# Altium PCB SumoPCB.PcbDoc (part 1 of 2)
Units mm, origin at the board's own origin, x right, y up, seen from the top; angles counter-clockwise.
Board outline 140 x 140 mm, 2 copper layers (Top Layer, Bottom Layer); 162 components, 184 nets, 713 pads, 374 vias.
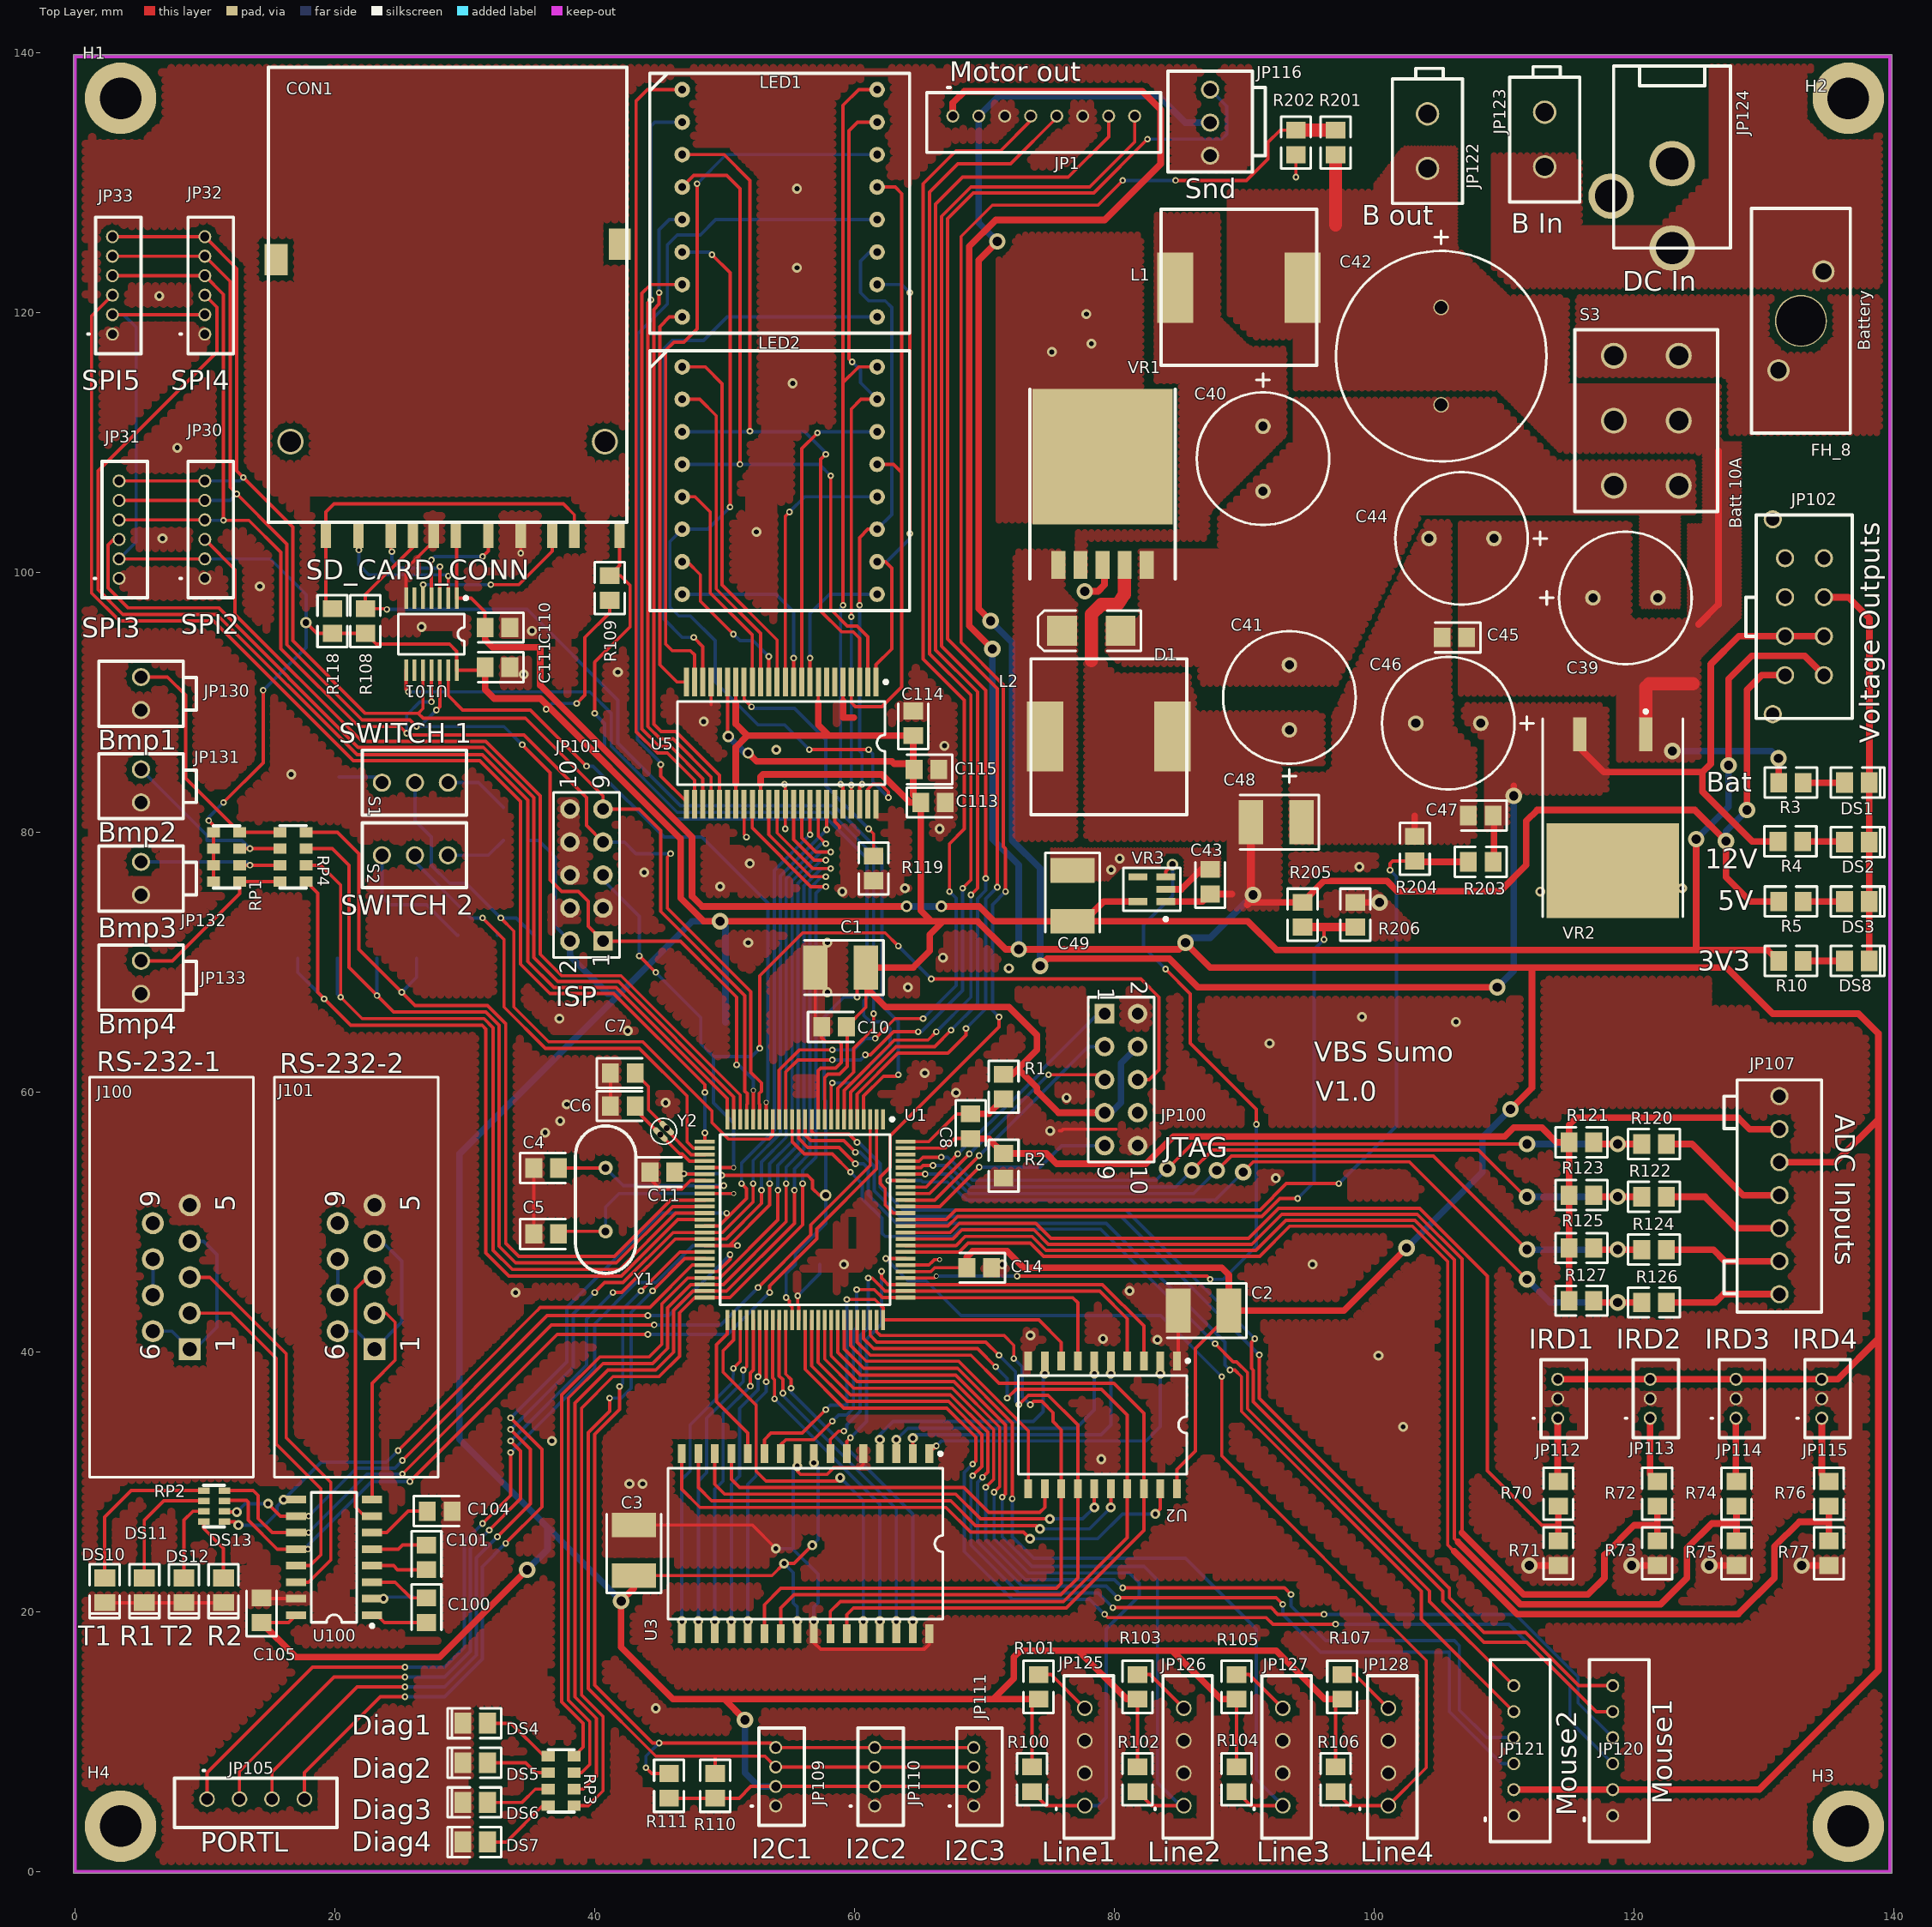
[diagram p0: Top Layer view]
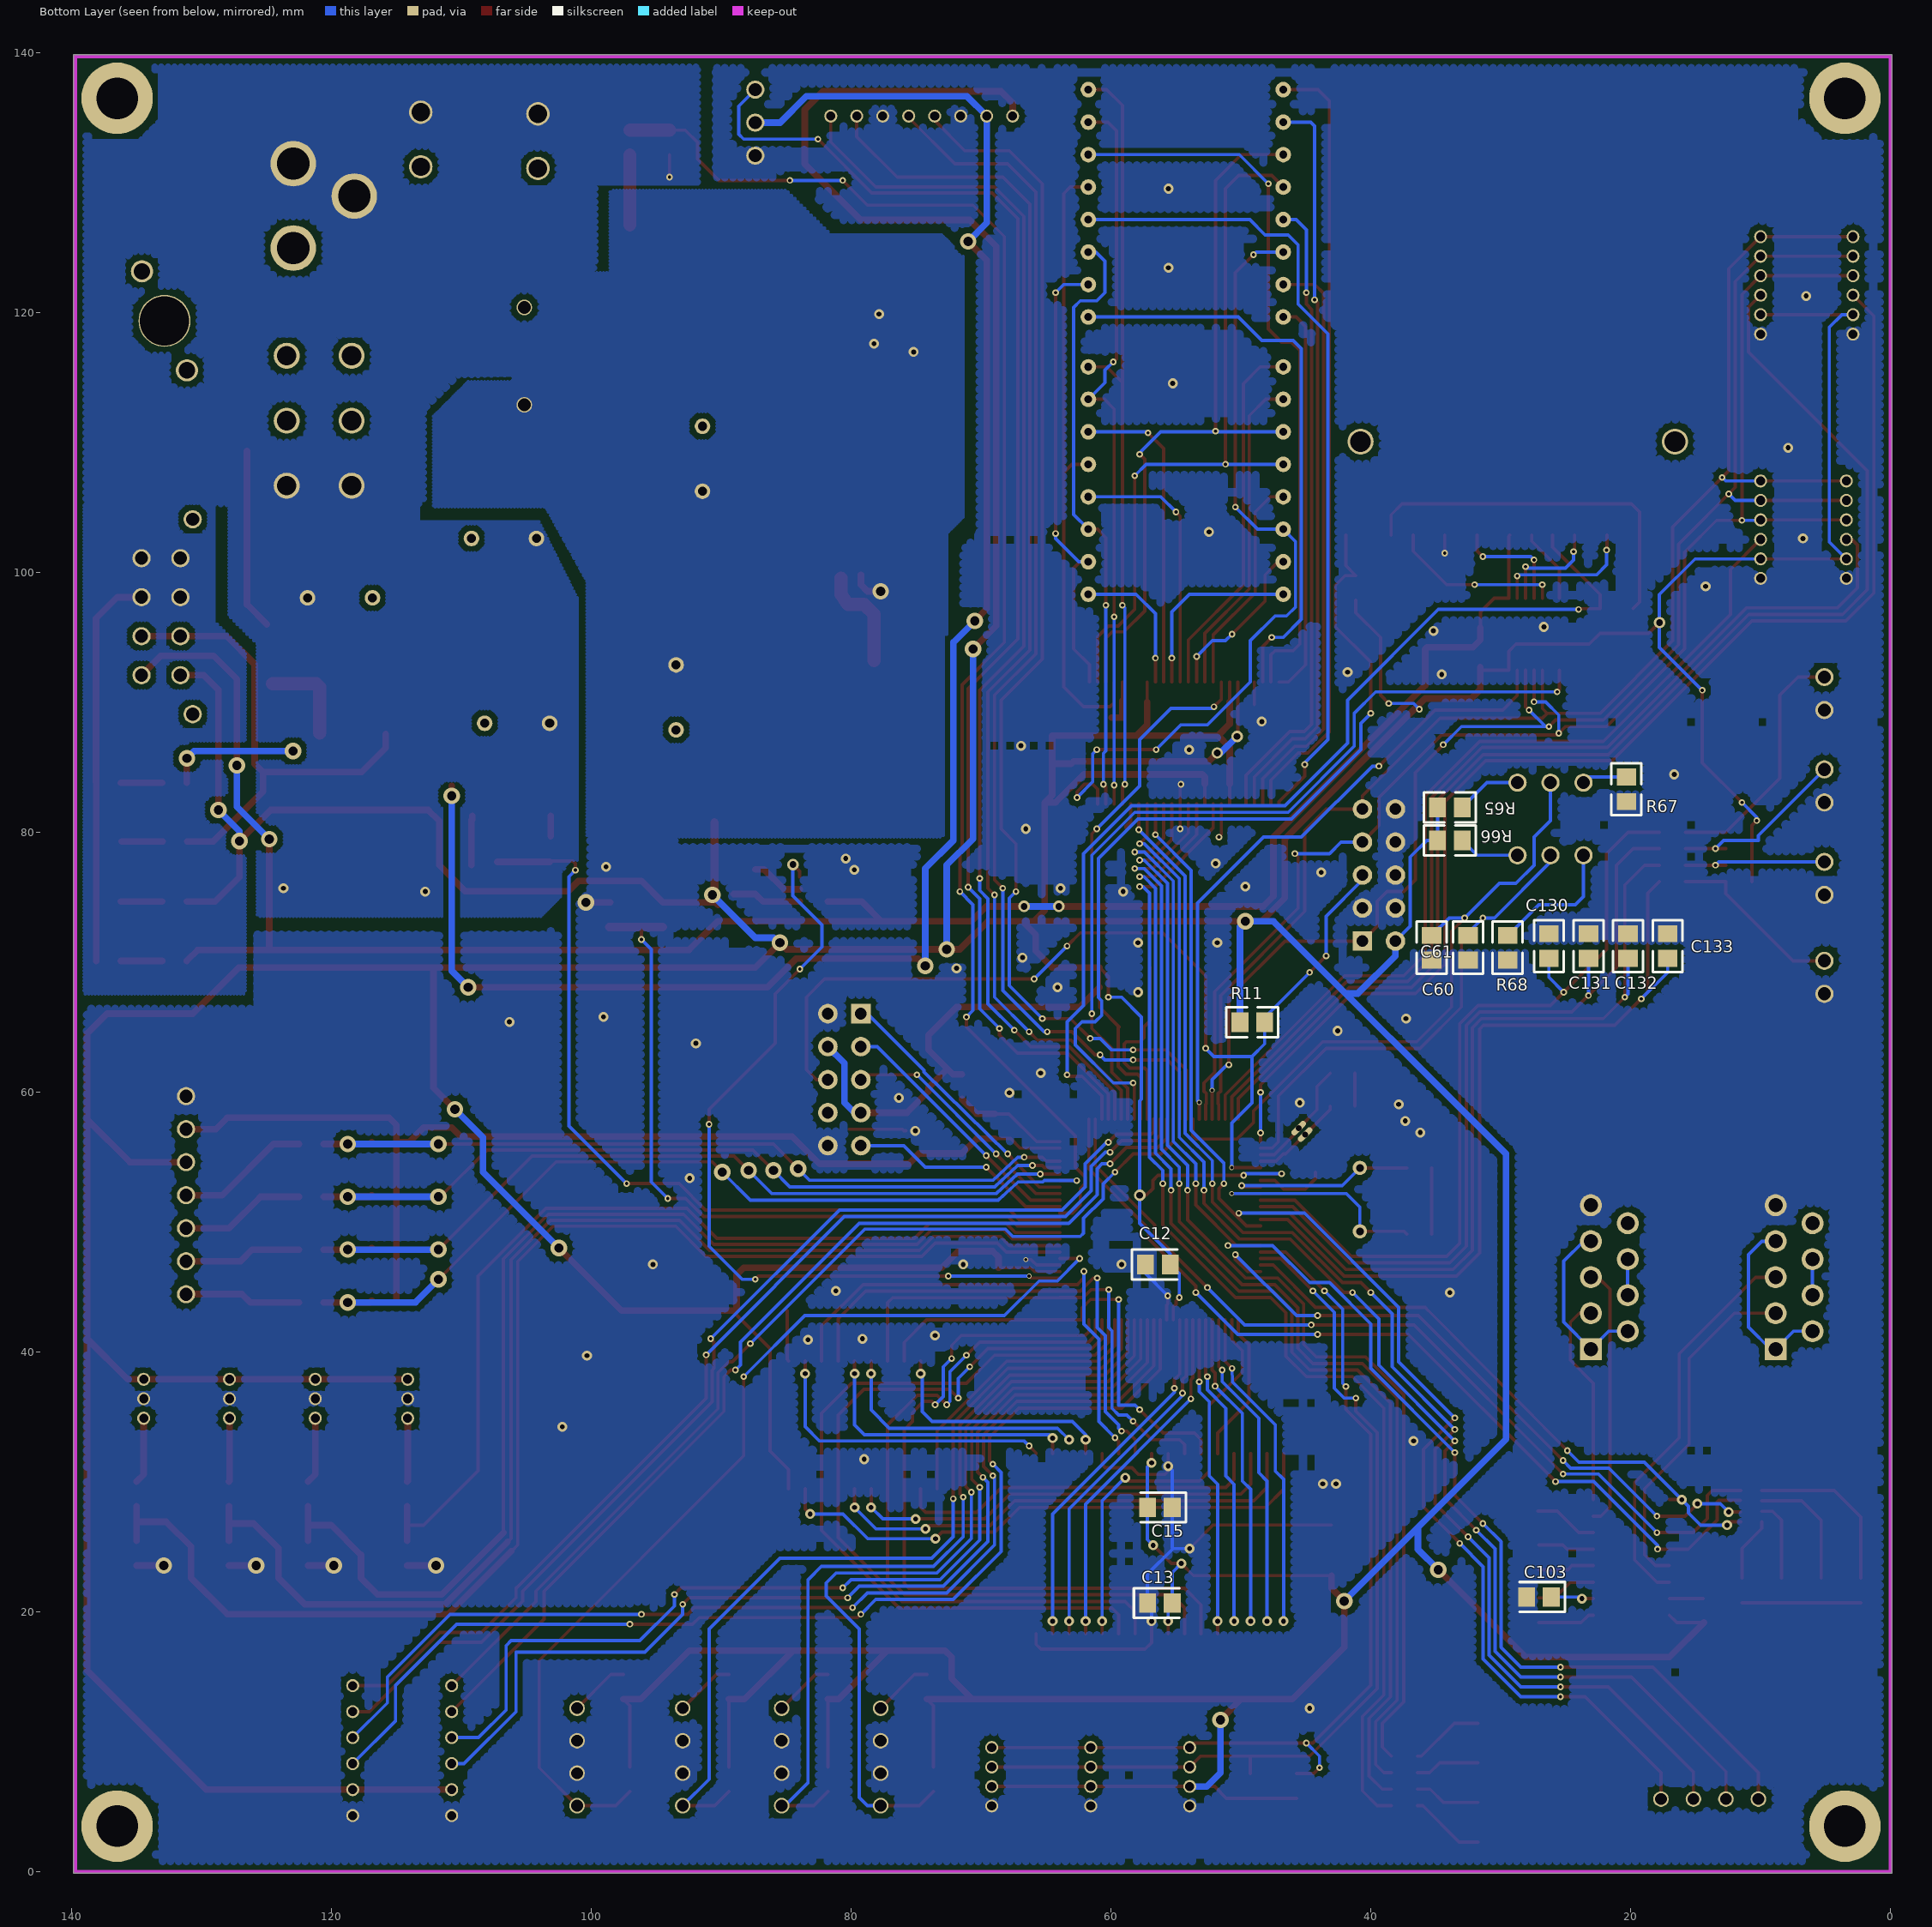
[diagram p1: Bottom Layer view, seen from below]

## Layer stack, top to bottom
Top Layer: signal copper 0.0356
Dielectric: dielectric 0.32, FR-4, Dk 4.8
Bottom Layer: signal copper 0.0356

## Board outline
-0.132,-0.132 139.868,-0.132 139.868,139.868 -0.132,139.868

## Design rules (kind name [scope] priority, off if disabled: settings)
Clearance [(InComponent('U1')) vs (InComponent('U1'))] p1: gap=0.152
Clearance Clearance_1_Polygons [(InPolygon)] p2: gap=0.381
Clearance Clearance_2_All [All] p3: gap=0.203
ComponentClearance [All] p1: gap=0.254 collisioncheckmode=0
HoleSize [All] p1: absolutevalues=TRUE maxlimit=3.8 minlimit=0.025 maxpercent=80.000 minpercent=20.000
PolygonConnect [All] p1: connectstyle=Direct reliefconductorwidth=0.254 reliefentries=4 polygonreliefangle="90 Angle"
RoutingLayers [All] p1: top layer=Horizontal bottom layer=Vertical
RoutingVias "Schematic Routing Via Style" [All] p1: holewidth=0.254 width=0.508 viastyle="Through Hole" minholewidth=0.254 minwidth=0.381 maxholewidth=0.711 maxwidth=1.27
SMDToPlane [All] p1: distance=0
SolderMaskExpansion [All] p1: expansion=0.102
TestPointUsage [All] p1: valid=0 allowmultiple=FALSE
Testpoint [All] p1: side=15 testpointundercomponent=TRUE minsize=1.016 maxsize=2.54 preferedsize=1.524 minholesize=0 maxholesize=1.016 preferedholesize=0.813 testpointgrid=0.025 style=1023 order=1234567890
Width "Schematic Width Constraint" [All] p1: maxlimit=2.54 minlimit=0.254 preferedwidth=0.254
15 further rules are at their usual default settings.

## Classes and differential pairs
component class "Interfaces and Connectors - Sensors": C60 C61 C130 C131 C132 C133 JP112 JP113 JP114 JP115 JP120 JP121 JP125 JP126 JP127 JP128 JP130 JP131 JP132 JP133 R65 R66 R67 R68 R70 R71 R72 R73 R74 R75 R76 R77 R100 R101 R102 R103 R104 R105 R106 R107 RP1 RP4 S1 S2
component class "Interfaces and Connectors": C100 C101 C103 C104 C105 C110 C111 C113 C114 C115 CON1 DS10 DS11 DS12 DS13 J100 J101 JP1 JP30 JP31 JP32 JP33 JP100 JP101 JP102 JP105 JP107 JP109 JP110 JP111 JP116 JP120 JP121 JP124 LED1 LED2 R108 R109 R110 R111 R118 R119 R120 R121 R122 R123 R124 R125 R126 R127 RP2 U5 U100 U101
component class "Microcontroller and Memory": C1 C2 C3 C4 C5 C6 C7 C8 C10 C11 C12 C13 C14 C15 DS1 DS2 DS3 DS4 DS5 DS6 DS7 DS8 H1 H2 H3 H4 R1 R2 R3 R4 R5 R10 R11 RP3 U1 U2 U3 Y1 Y2
component class "Power Regulation and Protection": C39 C40 C41 C42 C43 C44 C45 C46 C47 C48 C49 D1 FH_8 L1 L2 R201 R202 R203 R204 R205 R206 S3 VR1 VR2 VR3
net class A[8..15]: A0 A1 A2 A3 A4 A5 A6 A7 A8 A9 A10 A11 A12 A13 A14 A15
net class AD[0..7]: AD0 AD1 AD2 AD3 AD4 AD5 AD6 AD7

## Components (designator, comment, footprint, x,y, rotation, side; value= is the part's Value field where it differs from the comment)
C1 "Cap Tant" CC4532-1812 58.928,69.596 r180 top
C2 "Cap Tant" CC4532-1812 86.868,43.18 r180 top
C3 "Cap Tant" CC4532-1812 43.026,24.738 r90 top
C4 "20pF" CC2012-0805 36.266,54.166 r0 top
C5 "20pF" CC2012-0805 36.266,49.086 r0 top
C6 "6pF" CC2012-0805 42.164,58.928 r0 top
C7 "6pF" CC2012-0805 42.164,61.468 r0 top
C8 "100nF" CC2012-0805 68.934,57.377 r270 top
C10 "Cap Semi" CC2012-0805 58.42,65.024 r0 top
C11 "Cap Semi" CC2012-0805 45.212,53.848 r0 top
C12 "Cap Semi" CC2012-0805 56.388,46.736 r180 bottom
C13 "Cap Semi" CC2012-0805 56.234,20.674 r180 bottom
C14 "Cap Semi" CC2012-0805 69.596,46.482 r180 top
C15 "Cap Semi" CC2012-0805 56.234,28.04 r0 bottom
C39 "Cap Pol1" CAPPOL5-10X13 116.84,98.044 r0 top
C40 "Cap Pol1" CAPPOL5-10X13 91.44,111.252 r270 top
C41 "Cap Pol1" CAPPOL5-10X13 93.472,87.884 r90 top
C42 "Cap Pol1" CAPPOL7.5-16 105.156,120.396 r270 top
C43 "Cap Pol3" CC2012-0805 87.376,76.2 r90 top
C44 "Cap Pol1" CAPPOL5-10X13 109.22,102.616 r180 top
C45 "Cap Pol3" CC2012-0805 106.172,94.996 r180 top
C46 "Cap Pol1" CAPPOL5-10X13 108.204,88.392 r180 top
C47 "Cap Pol3" CC2012-0805 108.204,81.28 r180 top
C48 "Tant" CC4532-1812 92.456,80.772 r180 top
C49 "Low ESR 0.3-10R Tant" CC4532-1812 76.784,75.108 r270 top
C60 "Cap Semi" CR2012-0805 35.306,71.12 r90 bottom
C61 "Cap Semi" CR2012-0805 32.512,71.12 r270 bottom
C100 "Cap Semi" CC2012-0805 27.051,20.127 r270 top
C101 "Cap Semi" CC2012-0805 27.051,24.191 r270 top
C103 "Cap Semi" CC2012-0805 27.051,21.143 r0 bottom
C104 "Cap Semi" CC2012-0805 28.067,27.747 r0 top
C105 "Cap Semi" CC2012-0805 14.351,20.127 r90 top
C110 "Cap Semi" CC2012-0805 32.512,95.758 r180 top
C111 "Cap Semi" CC2012-0805 32.512,92.71 r180 top
C113 "Cap Semi" CC2012-0805 66.04,82.296 r0 top
C114 "Cap Semi" CC2012-0805 64.516,88.392 r90 top
C115 "Cap Semi" CC2012-0805 65.532,84.836 r180 top
C130 "Cap Semi" CR2012-0805 26.289,71.247 r270 bottom
C131 "Cap Semi" CR2012-0805 23.241,71.247 r270 bottom
C132 "Cap Semi" CR2012-0805 20.193,71.247 r270 bottom
C133 "Cap Semi" CR2012-0805 17.145,71.247 r270 bottom
CON1 "SD_CARD_CONN" "SD CARD AVX" 19.304,102.87 r0 top
D1 "10BQ100" SMB 78.232,95.504 r180 top
DS1 "Bat" "SMD _LED" 137.16,83.82 r180 top
DS2 "12V" "SMD _LED" 137.16,79.248 r180 top
DS3 "5V" "SMD _LED" 137.16,74.676 r180 top
DS4 "Diag1" "SMD _LED" 30.8,11.43 r0 top
DS5 "Diag2" "SMD _LED" 30.8,8.382 r0 top
DS6 "Diag3" "SMD _LED" 30.8,5.334 r0 top
DS7 "Diag4" "SMD _LED" 30.8,2.286 r0 top
DS8 "3V3" "SMD _LED" 137.16,70.104 r180 top
DS10 "T1" "SMD _LED" 2.286,21.651 r90 top
DS11 "R1" "SMD _LED" 5.334,21.651 r90 top
DS12 "T2" "SMD _LED" 8.382,21.651 r90 top
DS13 "R2" "SMD _LED" 11.43,21.651 r90 top
FH_8 "Battery" "FUSEHOLDER MINIBLADE" 136.652,128.016 r180 top
H1 "M3 Clearance" "M3 CLEARANCE"#1 3.175,135.89 r0 top
H2 "M3 Clearance" "M3 CLEARANCE"#2 135.763,133.35 r0 top
H3 "M3 Clearance" "M3 CLEARANCE"#3 136.271,3.302 r0 top
H4 "M3 Clearance" "M3 CLEARANCE"#4 3.556,3.556 r0 top
J100 "RS-232-1" "DSUB1.385-2H9 SIMPLE" 13.716,30.353 r90 top
J101 "RS-232-2" "DSUB1.385-2H9 SIMPLE" 27.94,30.353 r90 top
JP1 "Motor out" "PHR 1X8 2MM" 67.564,135.128 r0 top
JP30 "SPI2" "ZHR 1X6 1.5MM" 12.192,98.044 r90 top
JP31 "SPI3" "ZHR 1X6 1.5MM" 5.588,98.044 r90 top
JP32 "SPI4" "ZHR 1X6 1.5MM" 12.192,116.84 r90 top
JP33 "SPI5" "ZHR 1X6 1.5MM" 5.08,116.84 r90 top
JP100 "JTAG" HDR2X5 79.248,66.04 r270 top
JP101 "ISP" HDR2X5 40.64,71.628 r90 top
JP102 "Voltage Outputs" "microfit 2x4 3mm" 134.62,101.092 r90 top
JP105 "PORTL" "EHR 1X4 2.5MM" 10.16,5.588 r0 top
JP107 "ADC Inputs" "KK 1X7 2.54MM" 131.191,59.69 r270 top
JP109 "I2C1" "ZHR 1X4 1.5MM" 56.134,3.556 r90 top
JP110 "I2C2" "ZHR 1X4 1.5MM" 63.754,3.556 r90 top
JP111 "I2C3" "ZHR 1X4 1.5MM" 71.374,3.556 r90 top
JP112 "IRD1" "ZHR 1X3 1.5MM" 116.332,33.401 r90 top
JP113 "IRD2" "ZHR 1X3 1.5MM" 123.444,33.401 r90 top
JP114 "IRD3" "ZHR 1X3 1.5MM" 130.048,33.401 r90 top
JP115 "IRD4" "ZHR 1X3 1.5MM" 136.652,33.401 r90 top
JP116 "Snd" "KK 1X3 2.54MM" 87.376,132.08 r90 top
JP120 "Mouse1" "PHR 1X6 2MM" 118.364,4.318 r90 top
JP121 "Mouse2" "PHR 1X6 2MM" 110.744,4.318 r90 top
JP122 "B out" "MINI-FIT JNR 2X1 4.2MM" 106.807,128.397 r90 top
JP123 "B In" "MINI-FIT JNR 2X1 4.2MM" 115.824,128.524 r90 top
JP124 "DC In" "DC JACK 2.1MM" 122.936,124.968 r90 top
JP125 "Line1" "EHR 1X4 2.5MM" 77.724,5.08 r90 top
JP126 "Line2" "EHR 1X4 2.5MM" 85.344,5.08 r90 top
JP127 "Line3" "EHR 1X4 2.5MM" 92.964,5.08 r90 top
JP128 "Line4" "EHR 1X4 2.5MM" 101.092,5.08 r90 top
JP130 "Bmp1" "KK 1X2 2.54MM" 5.08,89.408 r90 top
JP131 "Bmp2" "KK 1X2 2.54MM" 5.08,82.296 r90 top
JP132 "Bmp3" "KK 1X2 2.54MM" 5.08,75.184 r90 top
JP133 "Bmp4" "KK 1X2 2.54MM" 5.08,67.564 r90 top
L1 "Inductor" "CDRH125 INDUCTOR" 94.488,121.92 r90 top
L2 "Inductor" "CDRH125 INDUCTOR" 74.676,87.376 r270 top
LED1 "8x8 LED Matrix" "8X8 LED MATRIX" 46.736,137.16 r0 top
LED2 "8x8 LED Matrix" "8X8 LED MATRIX" 46.736,115.824 r0 top
R1 "0K" R2012-0805 71.474,60.425 r90 top
R2 "0K" R2012-0805 71.474,54.329 r90 top
R3 "Res3" R2012-0805 132.08,83.82 r180 top
R4 "Res3" R2012-0805 132.044,79.299 r180 top
R5 "Res3" R2012-0805 132.08,74.676 r180 top
R10 "Res3" R2012-0805 132.08,70.104 r180 top
R11 "Res3" R2012-0805 49.122,65.378 r180 bottom
R65 "Res3" R2012-0805 33.909,81.915 r0 bottom
R66 "Res3" R2012-0805 33.909,79.375 r0 bottom
R67 "Res3" R2012-0805 20.32,83.312 r270 bottom
R68 "Res3" R2012-0805 29.464,71.12 r270 bottom
R70 "Res1" CR2012-0805 114.173,29.083 r90 top
R71 "Res1" CR2012-0805 114.173,24.511 r90 top
R72 "Res1" CR2012-0805 121.793,29.083 r90 top
R73 "Res1" CR2012-0805 121.793,24.511 r90 top
R74 "Res1" CR2012-0805 127.889,29.083 r90 top
R75 "Res1" CR2012-0805 127.889,24.511 r90 top
R76 "Res1" CR2012-0805 135.001,29.083 r90 top
R77 "Res1" CR2012-0805 135.001,24.511 r90 top
R100 "Res1" R2012-0805 73.66,7.112 r270 top
R101 "Res1" R2012-0805 74.168,14.224 r90 top
R102 "Res1" R2012-0805 81.788,7.112 r270 top
R103 "Res1" R2012-0805 81.788,14.224 r90 top
R104 "Res1" R2012-0805 89.408,7.112 r270 top
R105 "Res1" R2012-0805 89.408,14.224 r90 top
R106 "Res1" R2012-0805 97.028,7.112 r270 top
R107 "Res1" R2012-0805 97.536,14.224 r90 top
R108 "Res3" CR2012-0805 22.352,96.266 r270 top
R109 "Res3" CR2012-0805 41.148,98.806 r270 top
R110 "10K" CR2012-0805 49.276,6.604 r270 top
R111 "10K" CR2012-0805 45.72,6.604 r270 top
R118 "Res3" CR2012-0805 19.812,96.266 r270 top
R119 "Res3" CR2012-0805 61.468,77.216 r90 top
R120 "Res1" CR2012-0805 121.539,56.007 r0 top
R121 "Res1" CR2012-0805 115.951,56.134 r0 top
R122 "Res1" CR2012-0805 121.539,51.943 r0 top
R123 "Res1" CR2012-0805 115.951,52.07 r0 top
R124 "Res1" CR2012-0805 121.539,47.879 r0 top
R125 "Res1" CR2012-0805 115.951,48.006 r0 top
R126 "Res1" CR2012-0805 121.539,43.815 r0 top
R127 "Res1" CR2012-0805 115.951,43.942 r0 top
R201 "Res3" R2012-0805 97.028,133.096 r90 top
R202 "Res3" R2012-0805 93.98,133.096 r270 top
R203 "Res3" R2012-0805 108.204,77.724 r180 top
R204 "Res3" R2012-0805 103.124,78.74 r90 top
R205 "Res3" R2012-0805 94.488,73.66 r270 top
R206 "Res3" R2012-0805 98.552,73.66 r90 top
RP1 "ResPack x4" "4X0805 RESISTOR PACK" 10.668,76.2 r90 top
RP2 "ResPack x4" "4X0603 RESISTOR PACK" 9.906,29.337 r270 top
RP3 "ResPack x4" "4X0805 RESISTOR PACK" 38.42,8.89 r270 top
RP4 "ResPack x4" "4X0805 RESISTOR PACK" 17.78,80.01 r270 top
S1 "SWITCH 1" "SW SPDT" 23.622,83.82 r0 top
S2 "SWITCH 2" "SW SPDT" 23.622,78.232 r0 top
S3 "Batt 10A" "SW  DPDT" 123.444,106.68 r90 top
U1 "ATmega2560" F-QFP14X14-G100/Z17N 56.203,50.192 r270 top
U2 "74HC373M" SO-G20/Y1.45 79.094,34.39 r180 top
U3 "K6R1008C1D" SO-G32/Y1.45 56.234,25.246 r180 top
U5 "TLC5920" SSO-G48 54.356,86.868 r180 top
U100 "MAX232" SO-G16/C5.85 19.939,24.191 r90 top
U101 "MAX3392E" TSSOP14 27.432,95.25 r180 top
VR1 "LM2595S-5.0" "TO-263 5 PIN SMT" 75.692,100.584 r270 top
VR2 "MC7812CD2T" 936-03 118.364,82.296 r180 top
VR3 "TPS76333DBVR" SOT-23-5 82.88,75.616 r90 top
Y1 "16MHz" "CRYSTAL HC49SLF" 40.838,54.166 r270 top
Y2 "32kHz" "CRYSTAL CFS206" 45.058,56.742 r45 top

## Footprints (in the part's own frame and the unit in brackets; to place one, negate y for a bottom-side part, rotate by r counter-clockwise, add the part's x,y. Pads: shape width x height; smd on the part's side, far side on the other; paste and mask are expansions set on the pad)
"4X0603 RESISTOR PACK" [mm] "4x0603 Resistor pack 3.2 x 1.6mm, 0.8mm Pitch"
  rect 0.5x0.9 smd: 1(0,0) 2(0.8,0) 3(1.6,0) 4(2.4,0) 5(2.4,1.6) 6(1.6,1.6) 7(0.8,1.6) 8(0,1.6)
  silkscreen extent -0.4,0 2.8,1.6
"4X0805 RESISTOR PACK" [mm] "4x0805 Resistor pack 5.08 x 2mm, 1.27mm Pitch"
  rect 0.8x1 smd: 1(0,-2) 2(1.27,-2) 3(2.54,-2) 4(3.81,-2) 5(3.81,0) 6(2.54,0) 7(1.27,0) 8(0,0)
  silkscreen extent -0.5,-2 4.3,0
"8X8 LED MATRIX" [mm] "8x8 LED matrix 2.5mm pitch"
  round 1.2 hole 0.6: 1(0,0) 2(0,-2.5) 3(0,-5) 4(0,-7.5) 5(0,-10) 6(0,-12.5) 7(0,-15) 8(0,-17.5) 9(15,-17.5) 10(15,-15) 11(15,-12.5) 12(15,-10) 13(15,-7.5) 14(15,-5) 15(15,-2.5) 16(15,0)
  silkscreen extent -2.5,-18.75 17.5,1.25
936-03 [mm] "D2-PAK/TO-263-AB; 3 Leads (1 Cropped); Body 14.7 (inc. leads) x 10.2 mm (LxW max)"
  rect 1x2.6 smd: 1(-2.54,-5.25) 3(2.54,-5.25)
  rect 10.2x7.3 smd: 4(0,5.25)
  silkscreen extent -5.4,-7.12 5.4,8.8
CAPPOL5-10X13 [mm]
  round 1.2 hole 0.7: 1(0,0) 2(5,0)
  silkscreen extent -4.06,-5.1 7.6,5.1
CAPPOL7.5-16 [mm] "7.5P, 16D, 0.8PD"
  round 1.2 hole 1: 1(0,0) 2(7.5,0)
  silkscreen extent -5.9,-8.1 11.85,8.1
CC2012-0805 [mm]
  rect 1.3x1.5 smd: 1(-0.95,0) 2(0.95,0)
  silkscreen extent -2,-1.15 1.5,1.15
CC4532-1812 [mm]
  rect 1.9x3.4 smd: 1(-1.95,0) 2(1.95,0)
  silkscreen extent -3.3,-2.1 2.8,2.1
"CDRH125 INDUCTOR" [mm] "CDRH125 Inductor 12.3mm x 12.3mm"
  rect 5.4x2.8 smd: 1(0,0) 2(0,9.8)
  silkscreen extent -5.98,-1.1 6.02,10.9
CR2012-0805 [mm]
  rect 1.3x1.5 smd: 1(-0.95,0) 2(0.95,0)
  silkscreen extent -2,-1.15 2,1.15
"CRYSTAL CFS206" [mm] "Crystal CFS206 0.7mm pitch 0.2mm lead"
  oval 0.45x1.4 hole 0.45: 1(0,0) 2(0.7,0)
  silkscreen extent -0.65,-1 1.35,1
"CRYSTAL HC49SLF" [mm] "HC49SLF TH 4.88mm Pitch, 0.43mm lead"
  round 1.1 hole 0.6: 1(0,0) 2(4.88,0)
  silkscreen extent -3.23,-2.32 8.12,2.32
"DC JACK 2.1MM" [mm] "DC Jack 2.1mm  Altronics P0620"
  round 3.5 hole 2.5: 1(0,0) 2(6.5,0) 3(4,4.7)
  silkscreen extent 0,-4.5 14,4.5
"DSUB1.385-2H9 SIMPLE" [mm]
  rect 1.69x1.69 hole 1.09: 1(9.86,4.88)
  round 1.69 hole 1.09: 2(12.63,4.88) 3(15.4,4.88) 4(18.17,4.88) 5(20.94,4.88) 6(11.245,7.72) 7(14.015,7.72) 8(16.785,7.72) 9(19.555,7.72)
  silkscreen extent 0,0 30.8,12.6
"EHR 1X4 2.5MM" [mm] "JST EHR 1x4 2.5mm 3A"
  round 1.2 hole 0.9: 1(0,0) 2(2.5,0) 3(5,0) 4(7.5,0)
  silkscreen extent -2.5,-2.2 10,2.2
F-QFP14X14-G100/Z17N [mm]
  rect 1.55x0.3 smd: 1(-7.725,6) 2(-7.725,5.5) 3(-7.725,5) 4(-7.725,4.5) 5(-7.725,4) 6(-7.725,3.5) 7(-7.725,3) 8(-7.725,2.5) 9(-7.725,2) 10(-7.725,1.5) 11(-7.725,1) 12(-7.725,0.5) 13(-7.725,0) 14(-7.725,-0.5) 15(-7.725,-1) 16(-7.725,-1.5) 17(-7.725,-2) 18(-7.725,-2.5) 19(-7.725,-3) 20(-7.725,-3.5) 21(-7.725,-4) 22(-7.725,-4.5) 23(-7.725,-5) 24(-7.725,-5.5) 25(-7.725,-6) 51(7.725,-6) 52(7.725,-5.5) 53(7.725,-5) 54(7.725,-4.5) 55(7.725,-4) 56(7.725,-3.5) 57(7.725,-3) 58(7.725,-2.5) 59(7.725,-2) 60(7.725,-1.5) 61(7.725,-1) 62(7.725,-0.5) 63(7.725,0) 64(7.725,0.5) 65(7.725,1) 66(7.725,1.5) 67(7.725,2) 68(7.725,2.5) 69(7.725,3) 70(7.725,3.5) 71(7.725,4) 72(7.725,4.5) 73(7.725,5) 74(7.725,5.5) 75(7.725,6)
  rect 0.3x1.55 smd: 26(-6,-7.725) 27(-5.5,-7.725) 28(-5,-7.725) 29(-4.5,-7.725) 30(-4,-7.725) 31(-3.5,-7.725) 32(-3,-7.725) 33(-2.5,-7.725) 34(-2,-7.725) 35(-1.5,-7.725) 36(-1,-7.725) 37(-0.5,-7.725) 38(0,-7.725) 39(0.5,-7.725) 40(1,-7.725) 41(1.5,-7.725) 42(2,-7.725) 43(2.5,-7.725) 44(3,-7.725) 45(3.5,-7.725) 46(4,-7.725) 47(4.5,-7.725) 48(5,-7.725) 49(5.5,-7.725) 50(6,-7.725) 76(6,7.725) 77(5.5,7.725) 78(5,7.725) 79(4.5,7.725) 80(4,7.725) 81(3.5,7.725) 82(3,7.725) 83(2.5,7.725) 84(2,7.725) 85(1.5,7.725) 86(1,7.725) 87(0.5,7.725) 88(0,7.725) 89(-0.5,7.725) 90(-1,7.725) 91(-1.5,7.725) 92(-2,7.725) 93(-2.5,7.725) 94(-3,7.725) 95(-3.5,7.725) 96(-4,7.725) 97(-4.5,7.725) 98(-5,7.725) 99(-5.5,7.725) 100(-6,7.725)
  silkscreen extent -7.85,-6.55 6.55,6.83
"FUSEHOLDER MINIBLADE" [mm] "FuseHolder Miniblade"
  round 1.7 hole 1.27: 1(2.07,4.84) 2(5.53,12.46)
  round 4 hole 3.8: ""(3.8,8.65)
  silkscreen extent 0,0 7.6,17.3
HDR2X5 [mm] "Connector; Header; 5x2 Position"
  rect 1.5x1.5 hole 0.9: 1(0,0)
  round 1.5 hole 0.9: 2(0,2.54) 3(2.54,0) 4(2.54,2.54) 5(5.08,0) 6(5.08,2.54) 7(7.62,0) 8(7.62,2.54) 9(10.16,0) 10(10.16,2.54)
  silkscreen extent -1.27,-1.27 11.43,3.81
"KK 1X2 2.54MM" [mil] "KK 1x2 2.54mm 4A"
  round 55 hole 40: 1(0,0) 2(100,0)
  silkscreen extent -49,-167 148,128
"KK 1X3 2.54MM" [mil] "KK 1x3 2.54mm 4A"
  round 55 hole 40: 1(0,0) 2(100,0) 3(200,0)
  silkscreen extent -49,-167 256,128
"KK 1X7 2.54MM" [mil] "Molex KK 1x7 2.54mm 4A"
  round 55 hole 40: 1(0,0) 2(100,0) 3(200,0) 4(300,0) 5(400,0) 6(500,0) 7(600,0)
  silkscreen extent -49,-167 654,128
"M3 CLEARANCE"#1 [mm] "M3 Clearance.   3.2mm ID for M3 screw"
  round 5.5 hole 3.2: 1(0.325,0.61)
"M3 CLEARANCE"#2 [mm] "M3 Clearance.   3.2mm ID for M3 screw"
  round 5.5 hole 3.2: 1(0.737,3.15)
"M3 CLEARANCE"#3 [mm] "M3 Clearance.   3.2mm ID for M3 screw"
  round 5.5 hole 3.2: 1(0.229,0.198)
"M3 CLEARANCE"#4 [mm] "M3 Clearance.   3.2mm ID for M3 screw"
  round 5.5 hole 3.2: 1(-0.056,-0.056)
"microfit 2x4 3mm" [mm] "microfit 2x4 3mm 5A"
  round 1.4 hole 1.02: 1(0,0) 2(-3,0) 3(-6,0) 4(-9,0) 5(0,3) 6(-3,3) 7(-6,3) 8(-9,3) nc(-12,3.94) nc(3,3.94)
  silkscreen extent -12.32,-2.18 3.32,6
"MINI-FIT JNR 2X1 4.2MM" [mm] "Mini-Fit Jnr 2x1 4.2mm pitch 9A"
  round 1.8 hole 1.4: 1(2.7,2.7) 2(6.9,2.7)
  silkscreen extent 0,0 10.4,5.4
"PHR 1X6 2MM" [mm] "JST PHR 1x6 2mm 2A"
  round 1 hole 0.7: 1(0,0) 2(2,0) 3(4,0) 4(6,0) 5(8,0) 6(10,0)
  silkscreen extent -2,-2.8 12,2.2
"PHR 1X8 2MM" [mm] "JST PHR 1x8 2mm 2A"
  round 1 hole 0.7: 1(0,0) 2(2,0) 3(4,0) 4(6,0) 5(8,0) 6(10,0) 7(12,0) 8(14,0)
  silkscreen extent -2,-2.8 16,2.2
R2012-0805 [mm]
  rect 1.3x1.5 smd: 1(-0.95,0) 2(0.95,0)
  silkscreen extent -2,-1.15 2,1.15
"SD CARD AVX" [mm] "SD Card AVX 145638009211862"
  rect 0.8x2 smd: 1(2.5,0) 2(5,0) 3(8.3,0) 4(10,0) 5(12.5,0) 6(15,0) 7(17.43,0) 8(19.13,0) 9(0,0) 10(6.7,0) 11(22.62,0)
  rect 1.7x2.4 smd: 12(22.63,22.4)
  rect 1.8x2.4 smd: ""(-3.82,21.2)
  round 2 hole 1.6: ""(-2.72,7.2) ""(21.48,7.2)
  silkscreen extent -4.42,1 23.18,36
SMB [mm] "DO-214-AA/SMB; 2 C-Bend Leads; Body 5.3 x 3.6 mm, inc. leads (LxW)"
  rect 2.3x2.3 smd: 1(-2.25,0) 2(2.25,0)
  silkscreen extent -3.8,-1.55 4.1,1.55
"SMD _LED" [mm]
  rect 1.3x1.6 smd: 1(0.95,0) 2(-0.95,0)
  silkscreen extent -2.13,-1.15 2,1.15
SO-G16/C5.85 [mm]
  rect 0.6x1.55 smd: 1(-4.445,-2.925) 2(-3.175,-2.925) 3(-1.905,-2.925) 4(-0.635,-2.925) 5(0.635,-2.925) 6(1.905,-2.925) 7(3.175,-2.925) 8(4.445,-2.925) 9(4.445,2.925) 10(3.175,2.925) 11(1.905,2.925) 12(0.635,2.925) 13(-0.635,2.925) 14(-1.905,2.925) 15(-3.175,2.925) 16(-4.445,2.925)
  silkscreen extent -5.39,-3.05 5,1.75
SO-G20/Y1.45 [mm]
  rect 0.6x1.45 smd: 1(-5.715,-4.925) 2(-4.445,-4.925) 3(-3.175,-4.925) 4(-1.905,-4.925) 5(-0.635,-4.925) 6(0.635,-4.925) 7(1.905,-4.925) 8(3.175,-4.925) 9(4.445,-4.925) 10(5.715,-4.925) 11(5.715,4.925) 12(4.445,4.925) 13(3.175,4.925) 14(1.905,4.925) 15(0.635,4.925) 16(-0.635,4.925) 17(-1.905,4.925) 18(-3.175,4.925) 19(-4.445,4.925) 20(-5.715,4.925)
  silkscreen extent -6.69,-5.05 6.48,3.8
SO-G32/Y1.45 [mm]
  rect 0.6x1.45 smd: 1(-9.525,-6.925) 2(-8.255,-6.925) 3(-6.985,-6.925) 4(-5.715,-6.925) 5(-4.445,-6.925) 6(-3.175,-6.925) 7(-1.905,-6.925) 8(-0.635,-6.925) 9(0.635,-6.925) 10(1.905,-6.925) 11(3.175,-6.925) 12(4.445,-6.925) 13(5.715,-6.925) 14(6.985,-6.925) 15(8.255,-6.925) 16(9.525,-6.925) 17(9.525,6.925) 18(8.255,6.925) 19(6.985,6.925) 20(5.715,6.925) 21(4.445,6.925) 22(3.175,6.925) 23(1.905,6.925) 24(0.635,6.925) 25(-0.635,6.925) 26(-1.905,6.925) 27(-3.175,6.925) 28(-4.445,6.925) 29(-5.715,6.925) 30(-6.985,6.925) 31(-8.255,6.925) 32(-9.525,6.925)
  silkscreen extent -10.58,-7.05 10.58,5.8
SOT-23-5 [mm]
  rect 0.55x1.45 smd: 1(-0.95,-1.075) 2(0,-1.075) 3(0.95,-1.075) 4(0.95,1.075) 5(-0.95,1.075)
  silkscreen extent -2.42,-2.2 1.65,2.2
SSO-G48 [mm] "SSO-G48 25mil (~0.6mm)P 48 pads"
  rect 0.4x2.2 smd: 1(-7.302,-4.7) 2(-6.667,-4.7) 3(-6.032,-4.7) 4(-5.397,-4.7) 5(-4.762,-4.7) 6(-4.127,-4.7) 7(-3.492,-4.7) 8(-2.857,-4.7) 9(-2.222,-4.7) 10(-1.587,-4.7) 11(-0.952,-4.7) 12(-0.317,-4.7) 13(0.318,-4.7) 14(0.953,-4.7) 15(1.588,-4.7) 16(2.223,-4.7) 17(2.858,-4.7) 18(3.493,-4.7) 19(4.128,-4.7) 20(4.763,-4.7) 21(5.398,-4.7) 22(6.033,-4.7) 23(6.667,-4.7) 24(7.302,-4.7) 25(7.302,4.7) 26(6.667,4.7) 27(6.032,4.7) 28(5.397,4.7) 29(4.762,4.7) 30(4.127,4.7) 31(3.492,4.7) 32(2.858,4.7) 33(2.222,4.7) 34(1.587,4.7) 35(0.952,4.7) 36(0.317,4.7) 37(-0.318,4.7) 38(-0.953,4.7) 39(-1.588,4.7) 40(-2.223,4.7) 41(-2.858,4.7) 42(-3.493,4.7) 43(-4.128,4.7) 44(-4.763,4.7) 45(-5.397,4.7) 46(-6.033,4.7) 47(-6.667,4.7) 48(-7.302,4.7)
  silkscreen extent -8.18,-4.82 8,3.2
"SW  DPDT" [mm] "Alltronics Toggle"
  round 2 hole 1.5: 1(0,0) 2(5,0) 3(10,0) 4(0,5) 5(5,5) 6(10,5)
  silkscreen extent -2,-3 12,8
"SW SPDT" [mm] "SW SPDT 0.1\" pitch"
  round 1.4 hole 1: 1(0,0) 2(2.54,0) 3(5.08,0)
  silkscreen extent -1.5,-2.5 6.5,2.5
"TO-263 5 PIN SMT" [mm] "TO-263 5 Pin SMT"
  rect 2.16x1.07 smd: 1(0,0) 2(0,1.7) 3(0,3.4) 4(0,5.1) 5(0,6.8)
  rect 10.41x10.8 smd: 3(-8.33,3.4)
  silkscreen extent -13.5,-2.2 1.1,9
TSSOP14 [mm] "Shrink Small Outline; 14 Leads; Body Width 4.4 mm; Pitch 0.65 mm"
  rect 0.3x1.65 smd: 1(-1.95,-2.775) 2(-1.3,-2.775) 3(-0.65,-2.775) 4(0,-2.775) 5(0.65,-2.775) 6(1.3,-2.775) 7(1.95,-2.775) 8(1.95,2.775) 9(1.3,2.775) 10(0.65,2.775) 11(0,2.775) 12(-0.65,2.775) 13(-1.3,2.775) 14(-1.95,2.775)
  silkscreen extent -2.77,-2.9 2.55,1.55
"ZHR 1X3 1.5MM" [mm] "JST ZHR 1x3 1.5mm 1A"
  round 1 hole 0.7: 1(1.5,2.2) 2(3,2.2) 3(4.5,2.2)
  silkscreen extent 0,0 6,4.1
"ZHR 1X4 1.5MM" [mm] "JST ZHR 1x4 1.5mm 1A"
  round 1 hole 0.7: 1(1.5,2.2) 2(3,2.2) 3(4.5,2.2) 4(6,2.2)
  silkscreen extent 0,0 7.5,4.1
"ZHR 1X6 1.5MM" [mm] "JST ZHR 1x6 1.5mm 1A"
  round 1 hole 0.7: 1(1.5,2.2) 2(3,2.2) 3(4.5,2.2) 4(6,2.2) 5(7.5,2.2) 6(9,2.2)
  silkscreen extent 0,0 10.5,4.1

## Part data
C1 C2 C3 C100 C101 C103 C104 C105: library part "Cap Pol2", "Polarized Capacitor (Axial)"
C4 C5 C6 C7 C8: library part Cap, "Capacitor"
C10 C11 C12 C13 C14 C15 C60 C61 C110 C111 C113 C114 C115 C130 C131 C132 C133: "Capacitor (Semiconductor SIM Model)"
C39 C40 C41 C42 C44 C46: "Polarized Capacitor (Radial)"
C43 C45 C47: "Polarized Capacitor (Surface Mount)"
C48 C49: library part "Cap Semi", "Capacitor (Semiconductor SIM Model)"
D1: "Schottky Rectifier"
DS1 DS2 DS3 DS4 DS5 DS6 DS7 DS8 DS10 DS11 DS12 DS13: library part LED3, "Typical BLUE SiC LED"
FH_8: library part Fuse_Holder, "Fuse Holder"
H1 H2 H3 H4: library part "M3 Clearance hole", "3.2mm ID clearance hole for M3 screw"
J100 J101: library part "D Connector 9", "Receptacle Assembly, 9 Position, Right Angle"
JP1: library part "Header 8", "Header, 8-Pin"
JP30 JP31 JP32 JP33: library part "Header 6", "Header, 6-Pin"
JP100 JP101: library part "Header 5X2", "Header, 5-Pin, Dual row"
JP102: library part "Header 4X2", "Header, 4-Pin, Dual row"
JP105 JP107 JP109 JP110 JP111: library part "Header 4", "Header, 4-Pin"
JP112 JP113 JP114 JP115: library part MHDR1X3, "Header, 3-Pin"
JP116 JP124: library part "Header 3", "Header, 3-Pin"
JP120 JP121 JP122 JP123 JP130 JP131 JP132 JP133: library part "Header 2", "Header, 2-Pin"
JP125 JP126 JP127 JP128: library part "Header 4H", "Header, 4-Pin, Right Angle"
R1 R2 R110 R111: library part Res1, "Resistor"
R3 R4 R5 R10 R11 R65 R66 R67 R68 R70 R71 R72 R73 R74 R75 R76 R77 R100 R101 R102 R103 R104 R105 R106 R107 R108 R109 R118 R119 R120 R121 R122 R123 R124 R125 R126 R127 R201 R202 R203 R204 R205 R206: "Resistor"
S1 S2: library part SW-PB, "Switch"
S3: library part SW-SPDT, "SPDT Subminiature Toggle Switch, Right Angle Mounting, Vertical Actuation"
U1: "Atmel ATmega2560 MCU"
U2: library part 74373, "Octal 8-bit D-type Latch"
U3: "Samsung 128Kx8 High-Speed Static RAM"
U5: library part "TLC5920 16x8 LED Driver", "TLC5920 16x8 LED Driver"
U100: "Maxim RS-232 Transceiver"
VR1: "Simple Switcher Power Converter 150 kHz 1A Step Down Voltage Regulator"
VR2: "Three-Terminal Positive Voltage Regulator"
Y1 Y2: library part XTAL, "Crystal Oscillator"

## Via types
v1: diameter 0.508, hole 0.254, Top Layer to Bottom Layer, 222 vias
v2: diameter 0.762, hole 0.381, Top Layer to Bottom Layer, 100 vias
v3: diameter 1.27, hole 0.711, Top Layer to Bottom Layer, 39 vias
v4: diameter 0.889, hole 0.508, Top Layer to Bottom Layer, 7 vias
v5: diameter 0.381, hole 0.254, Top Layer to Bottom Layer, 6 vias

## Nets (pads, with @x,y where several pads share a name; then routed paths per layer and width w, separated by ;. In a path a pad name is that pad's centre, name@x,y a point inside that pad or via, vN(x,y) a via of type N, cw(c..) or ccw(c..) an arc to the next point about the centre after c; other vN are vias at no path point)
3V3: C49.2 C110.2 CON1.4 JP102.4 R10.2 U101.1 VR3.5 | length 159.1
  Top Layer w0.254: CON1.4@29.304,102.87 29.382,102.792 U101.1@29.382,98.025 30.499,98.025 31.562,96.962 C110.2@31.562,95.758
  Top Layer w0.508: C110.2@31.562,95.758 31.562,94.803 32.131,94.234 35.687,94.234 35.814,94.107 35.814,91.313 47.498,79.629 47.498,75.057 48.26,74.295 v4(64.008,74.295) ; v4(66.675,74.295) 69.596,74.295 70.733,73.158 90.266,73.158 92.481,70.942 130.292,70.942 R10.2@131.13,70.104 ; C49.2@77.668,73.158 79.176,74.666 VR3.5@81.805,74.666 ; 124.79,70.942 v3(124.79,79.477) ; v3(127.279,85.141) 127.279,91.796 129.057,93.574 133.138,93.574 JP102.4@134.62,92.092
  Bottom Layer w0.508: v4(64.008,74.295) v4(66.675,74.295) ; v3(124.79,79.477) 127.279,81.966 v3(127.279,85.141)
"3V3 ENABLE": U1.79 VR3.3 | length 63.3
  Top Layer w0.254: U1.79@63.928,45.692 66.139,45.692 v5(66.294,45.847) ; v1(72.517,45.847) 87.122,45.847 v1(87.376,45.593) ; v1(83.947,69.469) 85.852,67.564 85.852,63.754 90.932,58.674 v1(90.932,57.531) ; VR3.3@83.955,76.566 83.955,76.996 v4(84.48,77.521)
  Bottom Layer w0.254: v5(66.294,45.847) v1(72.517,45.847) ; v1(83.947,69.469) 82.245,71.171 82.245,72.873 84.48,75.108 v4(84.48,77.521) ; v1(87.376,45.593) 88.392,45.593 90.932,48.133 v1(90.932,57.531)
5V: C1.1 C2.1 C3.1 C10.2 C11.2 C12.2 C13.2 C14.2 C15.2 C41.1 C43.1 C48.2 C105.1 C111.2 C113.1 C114.1 C115.2 JP1.1 JP30.2 JP31.2 JP32.2 JP33.2 JP100.4 JP100.7 JP101.2 JP102.8 JP107.3 JP109.2 JP110.2 JP111.2 JP112.3 JP113.3 JP114.3 JP115.3 JP120.2 JP121.2 L2.2 R1.2 R5.2 R11.1 R65.2 R66.2 R100.1 R101.1 R102.1 R103.1 R104.1 R105.1 R106.1 R107.1 R108.2 R109.2 R110.2 R111.2 R118.2 R205.1 RP1.5 RP1.6 RP1.7 RP1.8 U1.10 U1.31 U1.61 U1.80 U2.20 U3.8 U3.24 U5.8 U5.18 U5.19 U5.31 U5.34 U100.16 U101.14 VR1.4 VR3.1 | length 1076.7
  Top Layer w0.254: JP33.2@2.88,119.84 JP32.2@9.992,119.84 ; JP31.2@3.388,101.044 JP30.2@9.992,101.044 ; v1(10.287,80.899) 10.668,80.518 RP1.8@10.668,76.2 ; v1(11.43,82.296) 14.478,85.344 v1(14.478,90.932) ; C105.1@14.351,19.177 16.445,19.177 U100.16@17.014,19.746 ; v4(17.78,96.139) 18.603,95.316 R108.2@22.352,95.316 23.18,94.488 28.829,94.488 29.382,93.935 U101.14@29.382,92.475 31.327,92.475 C111.2@31.562,92.71 ; v1(36.261,89.474) 36.261,89.85 ; v1(38.608,89.916) 39.243,90.551 39.243,94.996 41.148,96.901 R109.2@41.148,97.856 ; C3.1@43.026,22.788 53.649,22.788 v2(54.583,23.722) 55.345,23.722 v2(56.742,25.119) ; R111.2@45.72,5.654 51.12,5.654 52.022,6.556 JP111.2@69.174,6.556 ; v1(46.863,53.721) 46.892,53.692 U1.31@48.478,53.692 ; v1(49.784,53.594) 56.388,53.594 56.769,53.213 56.769,52.578 57.277,52.07 v4(57.785,52.07) ; U5.19@50.228,91.568 50.228,87.439 v4(50.292,87.376) ; U5.31@50.863,82.168 50.863,83.725 ; 50.863,90.011 U5.18@50.863,91.568 ; U5.34@52.768,82.168 52.768,83.725 ; v1(54.737,44.196) 54.991,43.942 54.991,43.669 55.203,43.458 U1.61@55.203,42.467 ; U3.24@55.599,18.321 v2(55.599,19.277) ; v2(56.869,31.469) U3.8@56.869,32.171 ; 57.213,90.011 U5.8@57.213,91.568 ; U1.10@57.703,57.917 57.703,61.132 57.963,61.392 58.852,61.392 59.436,61.976 59.436,64.958 C10.2@59.37,65.024 60.878,66.532 C1.1@60.878,69.596 60.198,68.916 v1(60.198,67.31) ; U1.80@63.928,46.192 65.877,46.192 66.167,46.482 C14.2@68.646,46.482 ; R100.1@73.66,8.062 73.66,12.766 R101.1@74.168,13.274 ; R102.1@81.788,8.062 R103.1@81.788,13.274 ; U2.20@84.809,29.465 84.809,30.961 86.233,32.385 86.233,40.259 88.818,42.844 C2.1@88.818,43.18 ; R104.1@89.408,8.062 R105.1@89.408,13.274 ; R106.1@97.028,8.062 97.028,12.766 R107.1@97.536,13.274
  Top Layer w0.508: C105.1@14.351,19.177 17.018,16.51 28.067,16.51 v3(34.798,23.241) ; C111.2@31.562,92.71 31.562,90.993 32.258,90.297 35.814,90.297 46.609,79.502 46.609,74.93 48.387,73.152 69.469,73.152 71.628,70.993 84.963,70.993 v3(85.471,71.501) 87.376,69.596 127.127,69.596 130.683,66.04 137.287,66.04 138.811,64.516 138.811,15.494 129.635,6.318 JP121.2@110.744,6.318 ; C3.1@43.026,22.788 43.026,21.817 v3(42.037,20.828) 42.037,17.272 46.035,13.274 R101.1@74.168,13.274 ; 49.972,13.274 v3(51.562,11.684) ; 50.863,83.725 50.863,86.556 51.75,87.442 ; 50.863,90.011 50.863,88.328 51.75,87.442 ; v4(51.816,86.106) 52.451,85.471 62.865,85.471 63.058,85.278 C115.2@64.516,85.278 ; 52.768,83.725 52.768,84.264 52.959,84.455 62.103,84.455 64.262,82.296 C113.1@65.09,82.296 ; 57.213,90.011 57.213,88.268 58.039,87.442 ; C1.1@60.878,68.072 62.402,66.548 71.882,66.548 74.041,64.389 74.041,63.246 72.17,61.375 R1.2@71.474,61.375 ; C1.1@60.878,69.596 64.516,69.596 65.786,70.866 65.786,72.136 66.802,73.152 ; 65.913,73.152 65.09,73.975 C113.1@65.09,82.296 ; JP1.1@67.564,135.128 67.564,136.144 68.453,137.033 82.169,137.033 83.566,135.636 83.566,131.445 79.248,127.127 70.866,127.127 68.834,125.095 68.834,95.885 v3(70.612,94.107) ; C14.2@68.646,46.482 68.646,47.31 69.088,47.752 71.755,47.752 73.025,46.482 88.265,46.482 88.818,45.929 C2.1@88.818,43.18 97.663,43.18 v3(102.489,48.006) ; 70.678,13.274 72.263,14.859 72.263,16.51 72.771,17.018 92.456,17.018 96.2,13.274 R107.1@97.536,13.274 ; 72.596,61.801 74.041,60.355 74.041,60.071 75.692,58.42 JP100.7@79.248,58.42 ; 77.216,17.018 80.96,13.274 R103.1@81.788,13.274 ; VR3.1@83.955,74.666 86.792,74.666 C43.1@87.376,75.25 89.037,75.25 ; 84.455,17.018 88.199,13.274 R105.1@89.408,13.274 ; v3@90.292,74.742 90.424,74.61 R205.1@94.488,74.61 96.129,76.251 100.99,76.251 101.778,75.463 109.703,75.463 111.709,77.47 111.709,80.874 112.547,81.712 124.689,81.712 v3(127.076,79.324) 127.076,76.556 128.956,74.676 R5.2@131.13,74.676 ; v3(110.49,58.674) 112.141,60.325 112.141,69.596 ; JP112.3@114.132,37.901 135.691,37.901 138.811,41.021 ; v3(128.702,81.712) 128.702,90.957 129.836,92.092 JP102.8@131.62,92.092 ; JP107.3@131.191,54.61 135.509,54.61 138.811,57.912 ; 51.75,87.442 C114.1@64.516,87.442 64.516,84.902 64.516,82.87 C113.1@65.09,82.296
  Top Layer w0.52: 90.236,74.422 90.33,74.516 90.424,74.61 v3@90.506,74.692
  Top Layer w0.635: v3@90.506,74.692 C48.2@90.506,80.772
  Top Layer w1.016: 78.232,93.218 78.232,96.774 78.994,97.536 80.264,97.536 80.772,98.298 VR1.4@80.772,99.568
  Bottom Layer w0.254: JP33.2@2.88,119.84 3.731,119.84 4.699,118.872 4.699,102.355 JP31.2@3.388,101.044 ; JP30.2@9.992,101.044 15.034,101.044 17.78,98.298 17.78,94.234 v1(14.478,90.932) ; v1(10.287,80.899) 10.287,81.153 v1(11.43,82.296) ; R65.2@34.859,81.915 R66.2@34.859,79.375 35.687,79.375 36.957,78.105 36.957,72.771 JP101.2@38.1,71.628 ; v1(36.261,89.474) 36.703,89.916 v1(38.608,89.916) ; v1(46.863,53.721) 49.657,53.721 v1(49.784,53.594) ; v2(54.583,23.722) 55.284,23.021 C13.2@55.284,20.674 55.599,20.359 v2(55.599,19.277) ; v1(54.737,44.196) 54.737,46.035 C12.2@55.438,46.736 55.438,47.564 57.785,49.911 57.785,59.325 57.658,59.452 57.658,65.786 59.182,67.31 v1(60.198,67.31) ; v2(56.742,25.119) 57.184,25.561 57.184,31.154 v2(56.869,31.469)
  Bottom Layer w0.508: v3(34.798,23.241) 36.372,24.815 36.372,26.493 ; JP101.2@38.1,71.628 38.1,70.485 40.994,67.591 41.937,67.591 ; v3(42.037,20.828) 29.591,33.274 29.591,55.245 47.498,73.152 v3(49.657,73.152) 50.072,72.737 R11.1@50.072,65.378 ; v4(50.292,87.376) 51.562,86.106 v4(51.816,86.106) ; v3(51.562,11.684) 51.562,7.62 52.626,6.556 JP109.2@53.934,6.556 ; v3(70.612,94.107) 70.612,79.502 72.644,77.47 v3(72.644,70.993) ; JP100.7@79.248,58.42 79.756,58.42 80.518,59.182 80.518,62.23 JP100.4@81.788,63.5 ; v3(85.471,71.501) 85.598,71.501 85.979,71.882 87.376,71.882 v3(90.678,75.184) ; v3(102.489,48.006) 108.331,53.848 108.331,56.515 v3(110.49,58.674) ; v3(127.076,79.324) 127.076,80.086 v3(128.702,81.712)
5VSENSE: R205.2 R206.1 U1.87 | length 56.9
  Top Layer w0.254: U1.87@63.928,49.692 67.206,49.692 67.933,50.419 91.352,50.419 92.749,51.816 v1(94.107,51.816) ; v1(96.139,71.755) 96.139,72.71
  Top Layer w0.635: R205.2@94.488,72.71 R206.1@98.618,72.71
  Bottom Layer w0.254: v1(94.107,51.816) 95.377,53.086 95.377,70.993 v1(96.139,71.755)
12V: C46.1 C47.1 JP1.2 JP102.3 JP102.7 JP116.2 R4.2 R203.1 VR2.3 | length 183.1
  Top Layer w0.508: v3(70.485,96.266) 69.545,97.206 69.545,124.028 v3(70.993,125.476) ; v3(74.295,69.723) 74.854,70.282 84.226,70.282 86.436,68.072 v3(109.474,68.072) ; C47.1@109.154,80.965 C47.1@109.154,81.28 ; R203.1@109.22,77.47 C47.1@109.22,80.965 ; v3(110.744,82.804) 110.744,83.566 ; VR2.3@115.824,87.546 115.824,86.487 117.678,84.633 125.273,84.633 ; R4.2@131.094,79.299 129.108,79.299 125.273,83.134 125.273,84.633 ; JP102.3@134.62,95.092 128.061,95.092 125.908,92.939 125.908,85.268 125.273,84.633
  Top Layer w0.52: VR2.3@115.824,86.766 VR2.3@115.824,87.546
  Bottom Layer w0.508: v3(70.485,96.266) 72.136,94.615 72.136,79.375 74.295,77.216 v3(74.295,69.723) ; v3(70.993,125.476) 69.564,126.905 JP1.2@69.564,135.128 71.088,136.652 83.439,136.652 85.471,134.62 JP116.2@87.376,134.62 ; v3(109.474,68.072) 110.744,69.342 v3(110.744,82.804)
12VSENSE: R203.2 R204.1 U1.88 | length 67.2
  Top Layer w0.254: U1.88@63.928,50.192 67.059,50.192 67.795,50.927 91.214,50.927 93.246,52.959 v1(97.282,52.959) ; v1(101.219,77.089) 101.219,77.597 101.412,77.79 R204.1@103.124,77.79
  Top Layer w0.508: R204.1@103.19,77.724 R203.2@107.254,77.724
  Bottom Layer w0.254: v1(97.282,52.959) 101.727,57.404 101.727,76.581 v1(101.219,77.089)
A0: U2.2 U3.1 | length 23.7
  Top Layer w0.254: U3.1@65.759,32.171 65.759,32.231 v1(66.294,32.766) ; v2(83.539,38.327) U2.2@83.539,39.315
  Bottom Layer w0.254: v1(66.294,32.766) 66.675,33.147 82.423,33.147 83.539,34.263 v2(83.539,38.327)
A1: U2.5 U3.2 | length 21.8
  Top Layer w0.254: U3.2@64.489,32.171 v2(64.489,33.374) ; v2(79.729,38.327) U2.5@79.729,39.315
  Bottom Layer w0.254: v2(64.489,33.374) 64.743,33.628 78.967,33.628 79.729,34.39 v2(79.729,38.327)
A2: U2.6 U3.3 | length 20.1
  Top Layer w0.254: v2@63.219,33.12 v2(63.219,33.247) ; v2(78.459,38.327) U2.6@78.459,39.315
  Bottom Layer w0.254: v2(63.219,33.247) 64.108,34.136 77.062,34.136 78.459,35.533 v2(78.459,38.327)
A3: U2.9 U3.4 | length 18.7
  Top Layer w0.254: U3.4@61.949,32.171 v2(61.949,33.247) ; v2(74.649,38.327) U2.9@74.649,39.315
  Bottom Layer w0.254: v2(61.949,33.247) 61.949,33.628 62.965,34.644 73.76,34.644 74.522,35.406 74.522,38.2 v2(74.649,38.327)
A4: U2.12 U3.13 | length 28.7
  Top Layer w0.254: U3.13@50.519,32.171 50.519,30.199 51.154,29.564 68.426,29.564 70.331,27.659 74.268,27.659 74.649,28.04 U2.12@74.649,29.465
A5: U2.15 U3.14 | length 34.5
  Top Layer w0.254: U3.14@49.249,32.171 49.249,29.818 50.011,29.056 67.791,29.056 69.696,27.151 v2(75.03,27.151) ; v2(78.459,28.04) U2.15@78.459,29.465
  Bottom Layer w0.254: v2(75.03,27.151) 77.57,27.151 v2(78.459,28.04)
A6: U2.16 U3.15 | length 37.8
  Top Layer w0.254: U3.15@47.979,32.171 47.979,29.564 48.995,28.548 67.41,28.548 69.315,26.643 74.014,26.643 v2(74.268,26.389) ; v2(79.729,28.04) U2.16@79.729,29.465
  Bottom Layer w0.254: v2(74.268,26.389) 78.078,26.389 v2(79.729,28.04)
A7: U2.19 U3.16 | length 43.6
  Top Layer w0.254: U3.16@46.709,32.171 46.709,29.437 48.106,28.04 67.029,28.04 68.934,26.135 72.998,26.135 v2(73.506,25.627) ; v2(83.158,27.532) 83.539,27.913 U2.19@83.539,29.465
  Bottom Layer w0.254: v2(73.506,25.627) 78.713,25.627 80.618,27.532 v2(83.158,27.532)
A8: U1.53 U3.17 | length 25
  Top Layer w0.254: v1(50.673,38.735) 51.203,39.265 U1.53@51.203,42.467
  Bottom Layer w0.254: v2(46.709,19.277) 46.709,30.199 47.344,30.834 47.344,34.39 50.646,37.692 v1(50.673,38.735)
A9: U1.54 U3.18 | length 24.7
  Top Layer w0.254: v1(51.435,38.608) 51.703,38.876 U1.54@51.703,42.467
  Bottom Layer w0.254: v2(47.979,19.277) 47.979,30.072 48.614,30.707 48.614,34.898 51.435,37.719 v1(51.435,38.608)
A10: U1.55 U3.19 | length 24.4
  Top Layer w0.254: v1(51.976,37.371) 51.976,38.387 52.203,38.614 U1.55@52.203,42.467
  Bottom Layer w0.254: v2(49.249,19.277) 49.249,29.437 49.884,30.072 49.884,35.279 v1(51.976,37.371)
A11: U1.56 U3.20 | length 24.1
  Top Layer w0.254: v1(52.578,38.1) 52.703,38.225 U1.56@52.703,42.467
  Bottom Layer w0.254: v2(50.519,19.277) 50.519,29.818 51.154,30.453 51.154,35.66 52.578,37.084 v1(52.578,38.1)
A12: U1.57 U3.21 | length 24.7
  Top Layer w0.254: U3.21@51.789,18.321 v2(51.789,19.277) ; v1(53.203,37.709) U1.57@53.203,42.467
  Bottom Layer w0.254: v2(51.789,19.277) 51.789,29.818 52.424,30.453 52.424,36.168 53.203,36.947 v1(53.203,37.709)
A13: U1.58 U3.29 | length 27.6
  Top Layer w0.254: U1.58@53.703,42.467 53.703,38.011 53.848,37.865 v1(53.848,36.394) ; U3.29@61.949,18.321 v2(61.949,19.277)
  Bottom Layer w0.254: v1(53.848,36.394) 61.949,28.294 v2(61.949,19.277)
A14: U1.59 U3.30 | length 27.9
  Top Layer w0.254: U1.59@54.203,42.467 54.203,38.157 54.483,37.877 v1(54.483,36.83) ; U3.30@63.219,18.321 v2(63.219,19.277)
  Bottom Layer w0.254: v1(54.483,36.83) 54.483,36.648 63.219,27.913 v2(63.219,19.277)
A15: U1.60 U3.31 | length 28.2
  Top Layer w0.254: U1.60@54.703,42.467 54.703,38.304 55.118,37.888 v1(55.118,37.211) ; U3.31@64.489,18.321 v2(64.489,19.277)
  Bottom Layer w0.254: v1(55.118,37.211) 55.118,36.902 64.489,27.532 v2(64.489,19.277)
AD0: U1.78 U2.3 U3.6 | length 40
  Top Layer w0.254: U3.6@59.409,32.171 59.409,33.12 v1(59.69,33.401) ; v1(62.076,46.201) 62.076,45.705 62.581,45.2 62.581,45.192 U1.78@63.928,45.192 ; U1.78@64.017,45.192 79.087,45.192 82.269,42.01 U2.3@82.269,39.315
  Bottom Layer w0.254: v1(59.69,33.401) 60.933,34.644 60.933,40.994 62.076,42.137 v1(62.076,46.201)
AD1: U1.77 U2.4 U3.7 | length 39.4
  Top Layer w0.254: U3.7@58.139,32.171 58.139,33.274 58.774,33.909 v1(59.182,33.909) ; v1(61.06,45.693) 61.361,45.693 62.354,44.7 ; 62.354,44.692 U1.77@63.928,44.692 ; U1.77@63.936,44.684 78.876,44.684 80.999,42.561 U2.4@80.999,39.315
  Bottom Layer w0.254: v1(59.182,33.909) 59.409,34.136 59.409,34.39 60.425,35.406 60.425,41.248 61.06,41.883 v1(61.06,45.693)
AD2: U1.76 U2.7 U3.10 | length 38.6
  Top Layer w0.254: U3.10@54.329,32.171 54.329,32.866 54.71,33.247 56.869,33.247 v1(58.293,34.671) ; v1(60.171,44.804) 61.524,44.804 62.136,44.192 U1.76@63.928,44.192 ; U1.76@63.944,44.176 76.801,44.176 77.189,43.788 U2.7@77.189,39.315
  Bottom Layer w0.254: v1(58.293,34.671) 58.774,35.152 59.409,35.152 59.917,35.66 59.917,41.629 60.171,41.883 v1(60.171,44.804)
AD3: U1.75 U2.8 U3.11 | length 36.5
  Top Layer w0.254: U3.11@53.059,32.171 53.059,33.247 53.567,33.755 55.98,33.755 v1(57.785,35.56) ; v1(59.409,44.042) 61.568,44.042 62.203,43.407 U1.75@62.203,42.467 74.192,42.467 75.919,40.74 U2.8@75.919,39.315
  Bottom Layer w0.254: v1(57.785,35.56) 58.139,35.914 59.409,35.914 v1(59.409,44.042)
AD4: U1.74 U2.13 U3.22 | length 58.4
  Top Layer w0.254: U3.22@53.059,18.321 53.059,20.547 54.329,21.817 75.538,21.817 75.919,22.198 75.919,34.009 75.284,34.644 75.284,35.333 74.422,36.195 73.787,36.195 v1(73.533,35.941) ; U1.74@61.703,42.467 61.703,41.548 61.976,41.275 71.501,41.275 72.263,40.513 v1(72.263,39.497)
  Bottom Layer w0.254: v1(72.263,39.497) 72.898,38.862 72.898,36.576 v1(73.533,35.941)
AD5: U1.73 U2.14 U3.23 | length 59.5
  Top Layer w0.254: U3.23@54.329,18.321 54.329,20.293 55.345,21.309 75.879,21.309 77.189,22.618 77.189,34.39 74.901,36.678 73.381,36.678 v1(72.644,35.941) ; U1.73@61.203,42.467 61.203,41.286 61.722,40.767 70.104,40.767 v1(71.12,39.751)
  Bottom Layer w0.254: v1(71.12,39.751) 72.39,38.481 72.39,36.195 v1(72.644,35.941)
AD6: U1.72 U2.17 U3.26 | length 62
  Top Layer w0.254: U3.26@58.139,18.321 58.139,20.039 58.901,20.801 76.089,20.801 80.999,25.71 80.999,35.152 79.015,37.135 72.441,37.135 v1(71.755,36.449) ; U1.72@60.703,42.467 60.703,41.024 61.468,40.259 69.469,40.259 v1(70.866,38.862)
  Bottom Layer w0.254: v1(70.866,38.862) 71.755,37.973 v1(71.755,36.449)
AD7: U1.71 U2.18 U3.27 | length 62.1
  Top Layer w0.254: U3.27@59.409,18.321 59.409,19.785 59.917,20.293 76.3,20.293 82.269,26.262 82.269,35.279 79.955,37.592 71.12,37.592 68.961,39.751 61.214,39.751 60.203,40.762 U1.71@60.203,42.467
ADC0: R120.1 R121.2 U1.97 | length 60.5
  Top Layer w0.254: U1.97@63.928,54.692 64.967,54.692 65.266,54.991 v1(66.675,54.991) ; v3(84.074,54.102) 85.979,56.007 v3(111.76,56.007)
  Top Layer w0.508: R121.2@116.901,56.134 117.028,56.007 R120.1@120.589,56.007
  Bottom Layer w0.254: v1(66.675,54.991) 67.183,54.991 69.088,53.213 83.185,53.213 v3(84.074,54.102)
  Bottom Layer w0.508: v3(111.76,56.007) v3(118.745,56.007)
ADC1: R122.1 R123.2 U1.96 | length 61.9
  Top Layer w0.254: U1.96@63.928,54.192 65.114,54.192 65.278,54.356 v1(66.04,54.356) ; v3(85.979,53.975) 87.554,55.55 108.026,55.55 111.633,51.943 v3(111.76,51.943)
  Top Layer w0.508: R123.2@116.901,52.07 117.028,51.943 R122.1@120.589,51.943
  Bottom Layer w0.254: v1(66.04,54.356) 67.171,54.356 68.949,52.705 84.709,52.705 v3(85.979,53.975)
  Bottom Layer w0.508: v3(111.76,51.943) v3(118.745,51.943)
ADC2: R124.1 R125.2 U1.95 | length 63.3
  Top Layer w0.254: U1.95@63.928,53.692 v1(65.434,53.692) ; v3(87.884,53.975) 89.002,55.093 104.546,55.093 v3(111.76,47.879)
  Top Layer w0.508: R125.2@116.901,48.006 117.028,47.879 R124.1@120.589,47.879
  Bottom Layer w0.254: v1(65.434,53.692) 67.189,53.692 68.811,52.197 86.106,52.197 v3(87.884,53.975)
  Bottom Layer w0.508: v3(111.76,47.879) v3(118.745,47.879)
ADC3: R126.1 R127.2 U1.94 | length 67.6
  Top Layer w0.254: v1(62.632,53.192) U1.94@63.928,53.192 ; v3(89.916,53.848) 90.703,54.635 102.718,54.635 v3(111.76,45.593)
  Top Layer w0.508: R127.2@116.901,43.942 117.028,43.815 R126.1@120.589,43.815
  Bottom Layer w0.254: v1@62.738,53.086 v1(62.632,53.192) 65.132,53.192 65.238,53.086 67.148,53.086 68.672,51.689 87.757,51.689 v3(89.916,53.848)
  Bottom Layer w0.508: v3(111.76,45.593) 113.538,43.815 v3(118.745,43.815)
AGND: C8.2 JP107.2 R2.2 R121.1 R123.1 R125.1 R127.1 U1.99 | length 84.1
  Top Layer w0.254: U1.99@63.928,55.692 66.995,55.692 67.73,56.427 C8.2@68.934,56.427
  Top Layer w0.508: C8.2@68.934,56.427 70.326,56.427 R2.2@71.474,55.279 74.769,55.279 75.565,54.483 82.423,54.483 84.531,56.591 110.058,56.591 110.744,57.277 112.903,57.277 114.046,56.134 R121.1@115.001,56.134 ; R127.1@115.001,43.942 115.001,57.47 115.57,58.039 128.016,58.039 128.905,57.15 JP107.2@131.191,57.15
ALE: U1.70 U2.11 | length 22.8
  Top Layer w0.254: U1.70@59.703,42.467 59.703,40.5 60.909,39.294 68.021,39.294 73.379,33.936 U2.11@73.379,29.465
AVCC: C8.1 R1.1 U1.100 | length 8.9
  Top Layer w0.254: U1.100@63.928,56.192 65.717,56.192 67.852,58.327 C8.1@68.934,58.327
  Top Layer w0.508: C8.1@68.934,58.327 70.326,58.327 R1.1@71.474,59.475
BMP1: C130.2 RP4.8 U1.35 | length 63.3
  Top Layer w0.254: RP4.8@17.78,80.01 20.193,80.01 21.844,78.359 21.844,70.993 26.162,66.675 31.75,66.675 33.147,65.278 33.147,48.387 34.163,47.371 41.529,47.371 45.85,51.692 U1.35@48.478,51.692
  Bottom Layer w0.254: v1(25.146,67.691) 26.289,68.834 C130.2@26.289,70.297
BMP2: C131.2 RP4.7 U1.36 | length 63.1
  Top Layer w0.254: RP4.7@17.78,78.74 19.812,78.74 21.082,77.47 21.082,69.596 24.511,66.167 31.611,66.167 32.639,65.139 32.639,48.133 33.909,46.863 41.668,46.863 45.996,51.192 U1.36@48.478,51.192
  Bottom Layer w0.254: v1(23.241,67.437) C131.2@23.241,70.297
BMP3: C132.2 RP4.6 U1.37 | length 63.6
  Top Layer w0.254: RP4.6@17.78,77.47 18.923,77.47 20.447,75.946 v1(20.447,67.31) 22.098,65.659 31.473,65.659 32.182,64.95 32.182,47.828 33.655,46.355 41.91,46.355 46.247,50.692 U1.37@48.478,50.692
  Bottom Layer w0.254: C132.2@20.193,70.297 20.193,67.564 v1(20.447,67.31)
BMP4: C133.2 RP4.5 U1.38 | length 63.6
  Top Layer w0.254: RP4.5@17.78,76.2 18.669,75.311 18.669,67.691 21.209,65.151 31.334,65.151 31.623,64.862 31.623,47.625 33.401,45.847 42.049,45.847 46.393,50.192 U1.38@48.478,50.192
  Bottom Layer w0.254: C133.2@17.145,70.297 17.145,69.215 v1(19.177,67.183)
COM0: LED1.13 LED2.13 U5.4 | length 48.4
  Top Layer w0.254: U5.4@59.753,91.568 59.753,89.98 60.071,89.662 62.103,89.662 63.627,91.186 63.627,129.159 63.126,129.66 LED1.13@61.736,129.66 ; LED2.13@61.736,108.324 62.999,108.324 63.627,107.696
COM1: LED1.3 LED2.3 U5.3 | length 56.7
  Top Layer w0.254: LED1.3@46.736,132.16 49.958,132.16 51.943,130.175 v1(51.943,110.871) ; v1(57.785,109.093) 57.404,108.712 57.404,97.028 59.004,95.428 59.893,95.428 60.389,94.932 U5.3@60.389,91.568
  Bottom Layer w0.254: LED2.3@46.736,110.824 56.181,110.824 57.785,109.22 v1(57.785,109.093) ; v1@51.943,110.824 v1(51.943,110.871)
COM2: LED1.4 LED2.4 U5.2 | length 55.9
  Top Layer w0.254: LED2.4@46.736,108.324 LED2.4@46.856,108.204 ; LED1.4@46.736,129.66 47.632,130.556 50.165,130.556 51.181,129.54 v1(51.181,108.324) ; v1(58.166,107.442) 58.166,97.155 59.436,95.885 60.198,95.885 61.023,95.059 U5.2@61.023,91.568
  Bottom Layer w0.254: LED2.4@46.736,108.324 57.284,108.324 v1(58.166,107.442)
COM3: LED1.10 LED2.10 U5.1 | length 35.6
  Top Layer w0.254: U5.1@61.658,91.568 61.658,92.9 62.865,94.107 62.865,100.33 62.371,100.824 LED2.10@61.736,100.824 ; v1(64.262,102.997) v1(64.262,121.539)
  Bottom Layer w0.254: LED2.10@61.736,100.824 62.47,100.824 64.262,102.616 v1(64.262,102.997) ; LED1.10@61.736,122.16 63.641,122.16 v1(64.262,121.539)
COM4: LED1.6 LED2.6 U5.47 | length 62.7
  Top Layer w0.254: v1(49.022,124.46) 50.419,123.063 v1(50.419,105.029) ; v1(56.515,86.36) v1(61.087,86.36) ; U5.47@61.023,82.168 61.023,83.314 61.403,83.693 62.039,83.693 62.611,83.121 v1(62.611,82.677)
  Bottom Layer w0.254: LED1.6@46.736,124.66 48.822,124.66 v1(49.022,124.46) ; v1(50.419,105.029) 48.714,103.324 LED2.6@46.736,103.324 45.796,102.384 45.796,97.333 46.482,96.647 47.371,96.647 49.276,94.742 49.276,91.567 52.578,88.265 54.61,88.265 v1(56.515,86.36) ; v1(61.087,86.36) 61.403,86.044 61.403,83.885 v1(62.611,82.677)
COM5: LED1.11 LED2.11 U5.46 | length 46.7
  Top Layer w0.254: U5.46@60.389,82.168 60.389,83.502 v1(60.579,83.693) ; v1(60.389,97.472) 60.389,102.679 61.033,103.324 LED2.11@61.736,103.324
  Bottom Layer w0.254: v1(60.389,97.472) 60.389,86.262 60.579,86.072 v1(60.579,83.693) ; LED2.11@61.736,103.324 62.865,104.453 62.865,120.396 62.357,120.904 61.087,120.904 60.452,121.539 60.452,123.952 61.16,124.66 LED1.11@61.736,124.66
COM6: LED1.15 LED2.15 U5.45 | length 56.7
  Top Layer w0.254: U5.45@59.753,82.168 v1(59.753,83.629) ; v1(59.753,96.584) 59.753,112.585 60.492,113.324 LED2.15@61.736,113.324 ; v1(59.817,116.205) 59.576,116.446 59.576,133.998 60.238,134.66 LED1.15@61.736,134.66
  Bottom Layer w0.254: v1(59.753,83.629) v1(59.753,96.584) ; v1(59.817,116.205) 60.452,115.57 60.452,114.608 LED2.15@61.736,113.324
COM7: LED1.16 LED2.16 U5.44 | length 60.2
  Top Layer w0.254: v1(58.928,83.693) 59.118,83.502 U5.44@59.118,82.168 ; v1(59.118,97.472) 59.118,135.953 60.325,137.16 LED1.16@61.736,137.16 ; 59.118,114.617 60.325,115.824 LED2.16@61.736,115.824
  Bottom Layer w0.254: v1(58.928,83.693) 58.928,97.282 v1(59.118,97.472)